# EAGLE board prototype2 (EAGLE 9.7.0)

Size 191.11 x 134.73 mm. Coordinates in mm from the lower left corner, seen from the top.
Outline: 0,0 191.11,0 191.11,134.73 0,134.73 0,0
Copper layers (1*16): Top 0.035mm / dielectric 1.5mm / Bottom 0.035mm
Design rules "default": minimum track width 6mil, minimum drill 0.35mm, track to track 6mil, track to pad 6mil, pad to pad 6mil, via to via 6mil, smd to smd 6mil, copper to edge 40mil, drill to drill 6mil, minimum pad ring 10mil, minimum via ring 8mil, stop-mask expansion 4mil, vias tented up to drill 0mil, thermal gap 10mil

## Footprints (pad centres in the part's own frame; a part is rotated, then mirrored left to right if it is on the bottom)
SWITCH-MOMENTARY-PTH-6.5MM = drill 1.016 pad 1.88: 1 -3.251,2.261; 2 3.251,2.261; 3 -3.251,-2.261; 4 3.251,-2.261
ARDUINO-UNO-R3-SHIELD = drill 1.016 pad 1.88: 3.3V 24.13,-2.54; 5V 24.13,0; A0 24.13,12.7; A1 24.13,15.24; A2 24.13,17.78; A3 24.13,20.32; A4 24.13,22.86; A5 24.13,25.4; AREF -24.13,-13.97; D2 -24.13,20.32; D3 -24.13,17.78; D4 -24.13,15.24; D5 -24.13,12.7; D6 -24.13,10.16; D7 -24.13,7.62; D8 -24.13,3.81; D9 -24.13,1.27; D10 -24.13,-1.27; D11 -24.13,-3.81; D12 -24.13,-6.35; D13 -24.13,-8.89; GND@0 24.13,2.54; GND@1 24.13,5.08; GND@2 -24.13,-11.43; IOREF 24.13,-7.62; NC 24.13,-10.16; RES 24.13,-5.08; RX -24.13,25.4; SCL -24.13,-19.05; SDA -24.13,-16.51; TX -24.13,22.86; VIN 24.13,7.62

## Placement (x,y rotation side)
S1  SWITCH_MOMENTARY  [SWITCH-MOMENTARY-PTH-6.5MM]  9.67,52.98 60 top
S2  SWITCH_MOMENTARY  [SWITCH-MOMENTARY-PTH-6.5MM]  43.99,53.65 60 top
S3  SWITCH_MOMENTARY  [SWITCH-MOMENTARY-PTH-6.5MM]  63.41,53.2 60 top
S4  SWITCH_MOMENTARY  [SWITCH-MOMENTARY-PTH-6.5MM]  78.76,53.2 60 top
S5  SWITCH_MOMENTARY  [SWITCH-MOMENTARY-PTH-6.5MM]  97.05,53.65 60 top
S6  SWITCH_MOMENTARY  [SWITCH-MOMENTARY-PTH-6.5MM]  116.92,53.65 90 top
S7  SWITCH_MOMENTARY  [SWITCH-MOMENTARY-PTH-6.5MM]  139.5,53.65 90 top
S8  SWITCH_MOMENTARY  [SWITCH-MOMENTARY-PTH-6.5MM]  157.79,53.43 90 top
S9  SWITCH_MOMENTARY  [SWITCH-MOMENTARY-PTH-6.5MM]  180.37,52.75 90 top
S10  SWITCH_MOMENTARY  [SWITCH-MOMENTARY-PTH-6.5MM]  181.72,31.3 90 top
S11  SWITCH_MOMENTARY  [SWITCH-MOMENTARY-PTH-6.5MM]  182.85,8.27 90 top
S12  SWITCH_MOMENTARY  [SWITCH-MOMENTARY-PTH-6.5MM]  160.27,30.4 90 top
S13  SWITCH_MOMENTARY  [SWITCH-MOMENTARY-PTH-6.5MM]  161.85,8.72 90 top
S14  SWITCH_MOMENTARY  [SWITCH-MOMENTARY-PTH-6.5MM]  142.44,8.72 90 top
S15  SWITCH_MOMENTARY  [SWITCH-MOMENTARY-PTH-6.5MM]  140.85,30.17 90 top
S16  SWITCH_MOMENTARY  [SWITCH-MOMENTARY-PTH-6.5MM]  119.18,29.95 90 top
S17  SWITCH_MOMENTARY  [SWITCH-MOMENTARY-PTH-6.5MM]  120.76,8.27 90 top
S18  SWITCH_MOMENTARY  [SWITCH-MOMENTARY-PTH-6.5MM]  98.63,29.49 90 top
S19  SWITCH_MOMENTARY  [SWITCH-MOMENTARY-PTH-6.5MM]  99.99,7.37 90 top
S20  SWITCH_MOMENTARY  [SWITCH-MOMENTARY-PTH-6.5MM]  26.15,53.43 60 top
S21  SWITCH_MOMENTARY  [SWITCH-MOMENTARY-PTH-6.5MM]  80.57,30.17 90 top
S22  SWITCH_MOMENTARY  [SWITCH-MOMENTARY-PTH-6.5MM]  81.02,7.82 90 top
S23  SWITCH_MOMENTARY  [SWITCH-MOMENTARY-PTH-6.5MM]  64.31,30.4 90 top
S24  SWITCH_MOMENTARY  [SWITCH-MOMENTARY-PTH-6.5MM]  63.63,8.72 90 top
S25  SWITCH_MOMENTARY  [SWITCH-MOMENTARY-PTH-6.5MM]  45.34,31.98 90 top
S26  SWITCH_MOMENTARY  [SWITCH-MOMENTARY-PTH-6.5MM]  47.6,8.49 90 top
S27  SWITCH_MOMENTARY  [SWITCH-MOMENTARY-PTH-6.5MM]  27.28,30.4 90 top
S28  SWITCH_MOMENTARY  [SWITCH-MOMENTARY-PTH-6.5MM]  27.96,7.59 90 top
S29  SWITCH_MOMENTARY  [SWITCH-MOMENTARY-PTH-6.5MM]  10.57,31.07 90 top
S30  SWITCH_MOMENTARY  [SWITCH-MOMENTARY-PTH-6.5MM]  11.93,8.72 90 top
U1  ARDUINO-UNO-R3-SHIELD  [ARDUINO-UNO-R3-SHIELD]  84.95,104.89 90 top

## Library data of the parts
S1-S30 U1 = Tinkercad

## Nets
U1_A0: S11.4 S13.4 S14.4 S17.4 S19.4 S22.4 S24.4 S26.4 S28.4 S30.4 U1.A0
U1_A1: S10.4 S12.4 S15.4 S16.4 S18.4 S21.4 S23.4 S25.4 S27.4 S29.4 U1.A1
U1_A2: S1.4 S2.4 S3.4 S4.4 S5.4 S6.4 S7.4 S8.4 S9.4 S20.4 U1.A2
U1_D3: S1.2 S29.2 S30.2 U1.D3
U1_D4: S20.2 S27.2 S28.2 U1.D4
U1_D5: S2.2 S25.2 S26.2 U1.D5
U1_D6: S3.2 S23.2 S24.2 U1.D6
U1_D7: S4.2 S21.2 S22.2 U1.D7
U1_D8: S5.2 S18.2 S19.2 U1.D8
U1_D9: S6.2 S16.2 S17.2 U1.D9
U1_D10: S7.2 S14.2 S15.2 U1.D10
U1_D11: S8.2 S12.2 S13.2 U1.D11
U1_D12: S9.2 S10.2 S11.2 U1.D12

## Tracks (layer width: path | path; a pad name or v marks a point on that pad's centre or on a via)
U1_A0  (10 unrouted)
U1_A1  (10 unrouted)
U1_A2  (10 unrouted)
U1_D3  (3 unrouted)
U1_D4  (3 unrouted)
U1_D5  (3 unrouted)
U1_D6  (3 unrouted)
U1_D7  (3 unrouted)
U1_D8  (3 unrouted)
U1_D9  (3 unrouted)
U1_D10  (3 unrouted)
U1_D11  (3 unrouted)
U1_D12  (3 unrouted)